# EAGLE board qPCR_pcb_module_power (EAGLE 9.6.1)

Size 100 x 80 mm. Coordinates in mm from the lower left corner, seen from the top.
Outline: 0,0 100,0 100,80 0,80 0,0
Copper layers (1*16): Top 0.035mm / dielectric 1.5mm / Bottom 0.035mm
Design rules "default": minimum track width 6mil, minimum drill 0.35mm, track to track 6mil, track to pad 6mil, pad to pad 6mil, via to via 6mil, smd to smd 6mil, copper to edge 40mil, drill to drill 6mil, minimum pad ring 10mil, minimum via ring 8mil, stop-mask expansion 4mil, vias tented up to drill 0mil, thermal gap 10mil

## Footprints (pad centres in the part's own frame; a part is rotated, then mirrored left to right if it is on the bottom)
3P-L14.2*W11.0*H9.0MM = smd 2.032 x 4.064 bottom: +B 3.175,0; -1B -3.048,0 | smd 2.032 x 4.064: +T 3.175,0; -1T -3.048,0 | smd 4.064 x 2.032 bottom: -2B 0,-4.953 | smd 4.064 x 2.032: -2T 0,-4.953

## Placement (x,y rotation side)
J1  [3P-L14.2*W11.0*H9.0MM]  6.35,10.16 0 top

## Library data of the parts
J1 = OPL_Connector